# Altium PCB Hack_Final.PcbDoc (part 2 of 3)
Units mm, origin at the board's own origin, x right, y up, seen from the top; angles counter-clockwise.
Board outline 325.37 x 149.48 mm, 4 copper layers (Top Layer, Layer 1, Layer 2, Bottom Layer), stack 0.603 mm thick; 363 components, 196 nets, 927 pads, 198 vias.
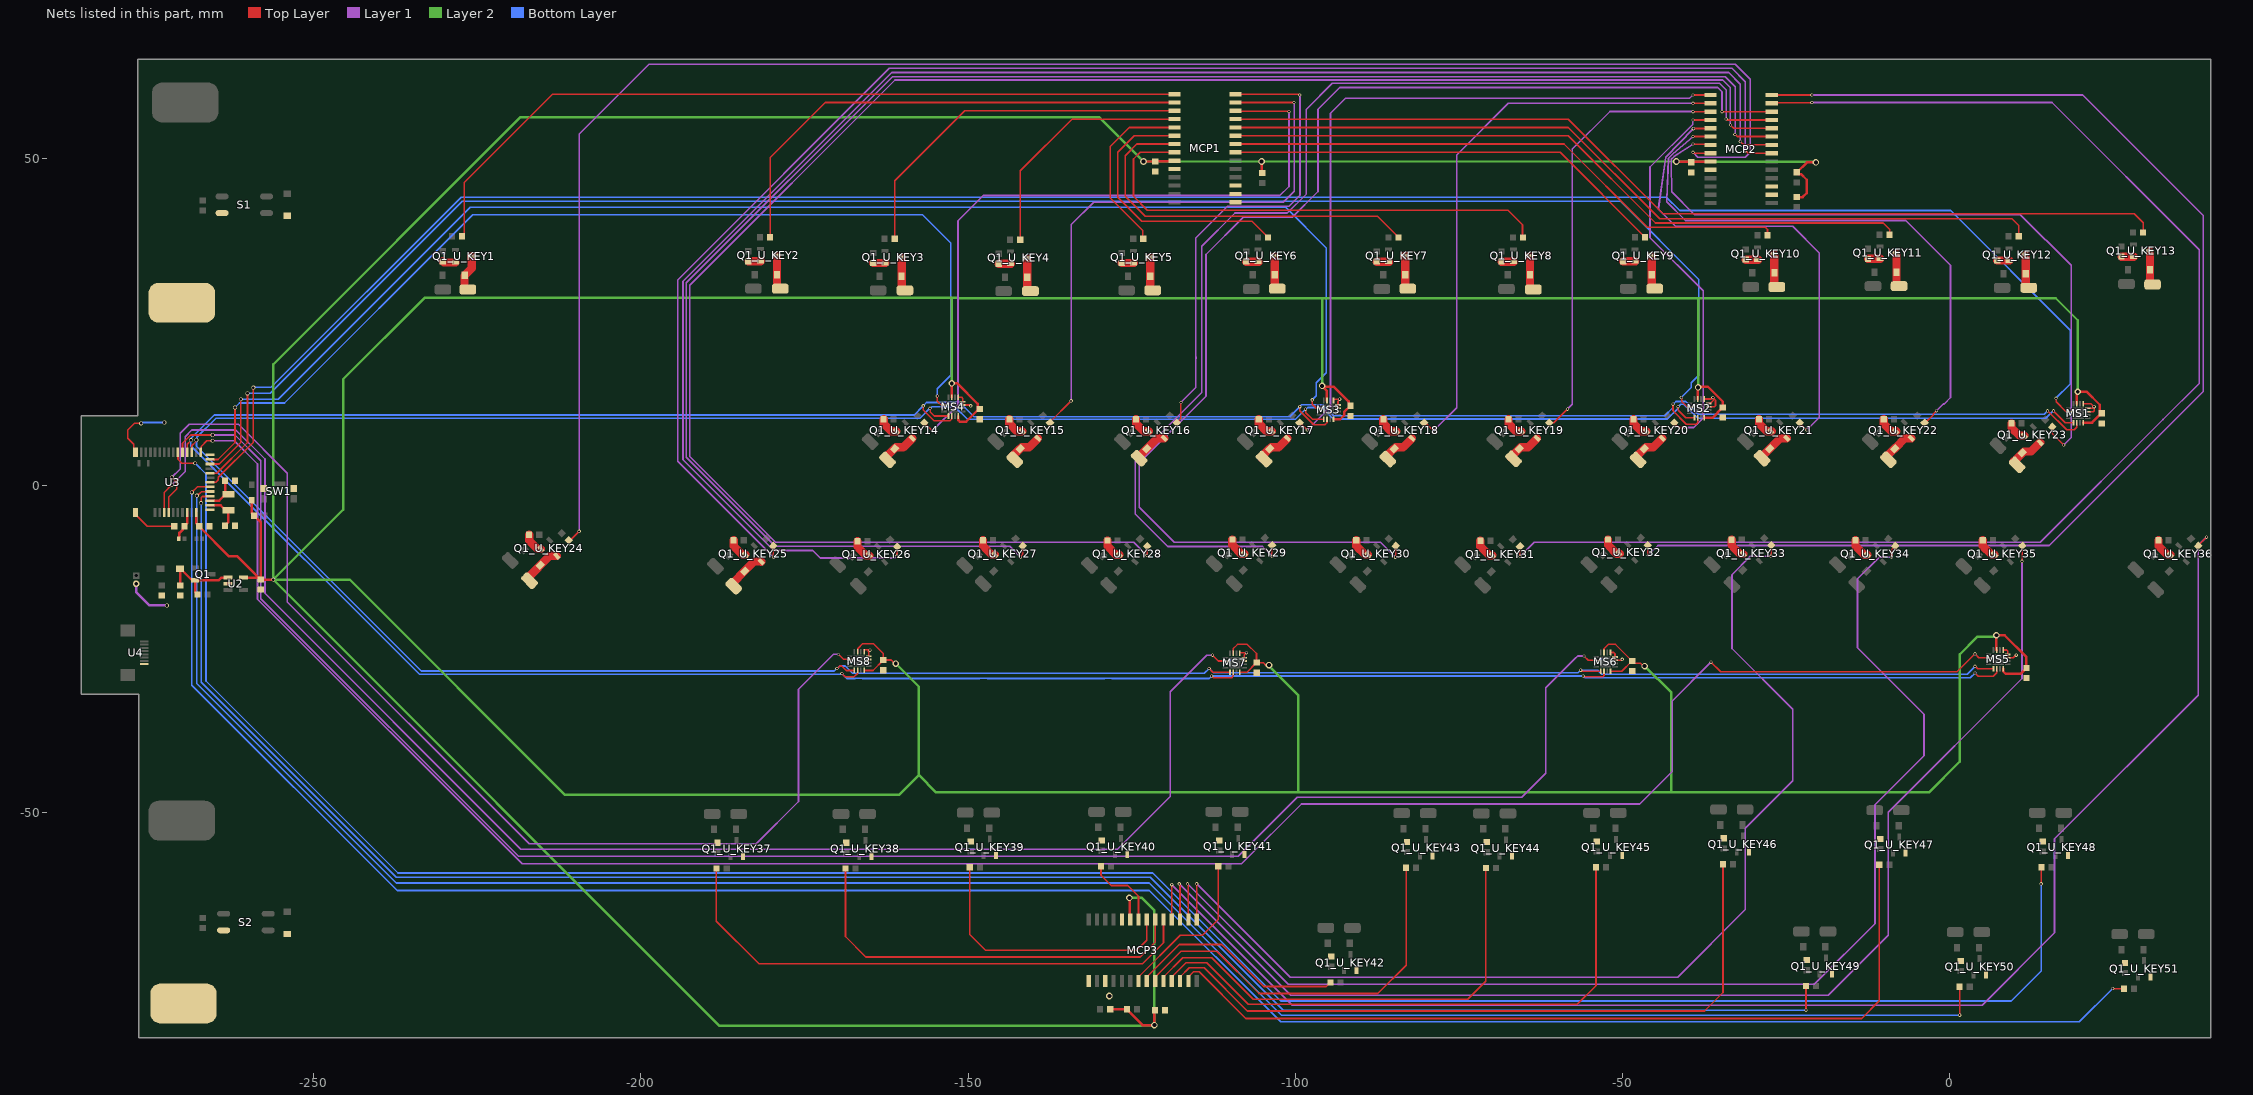
[diagram p4: the nets of this part, all layers, seen from the top]

## Part data
C1 C2 C3 C4 C5 C6 C7 C8 C9 C10 C11 C12 C13 C14 C15 C16 C17: library part CAP, "capacitance", Package=0603, SuppliersPartNumber=C15849, ComponentLink1Description=供应商链接, ComponentLink1URL=http://www.szlcsc.com/product/details_16531.html, Supplier=LC
D1: library part DIO_5, "schottky diode", Package=SOD-123, SuppliersPartNumber=C8598, ComponentLink1Description=供应商链接, ComponentLink1URL=http://www.szlcsc.com/product/details_9093.html, Supplier=LC
D1_U_KEY1 D1_U_KEY2 D1_U_KEY3 D1_U_KEY4 D1_U_KEY5 D1_U_KEY6 D1_U_KEY7 D1_U_KEY8 D1_U_KEY9 D1_U_KEY10 D1_U_KEY11 D1_U_KEY12 D1_U_KEY13 D1_U_KEY14 D1_U_KEY15 D1_U_KEY16 D1_U_KEY17 D1_U_KEY18 D1_U_KEY19 D1_U_KEY20 D1_U_KEY21 D1_U_KEY22 D1_U_KEY23 D1_U_KEY24 D1_U_KEY25 D1_U_KEY26 D1_U_KEY27 D1_U_KEY28 D1_U_KEY29 D1_U_KEY30 D1_U_KEY31 D1_U_KEY32 D1_U_KEY33 D1_U_KEY34 D1_U_KEY35 D1_U_KEY36 D1_U_KEY37 D1_U_KEY38 D1_U_KEY39 D1_U_KEY40 D1_U_KEY41 D1_U_KEY42 D1_U_KEY43 D1_U_KEY44 D1_U_KEY45 D1_U_KEY46 D1_U_KEY47 D1_U_KEY48 D1_U_KEY49 D1_U_KEY50 D1_U_KEY51 DSK1 DSK2: Average Rectified Current (Io)=1A, Forward Voltage (Vf@If)=700mV@1A, JLCPCB Part Class="Extended Part", LCSC Part Name="电压:60V 电流:1A", Manufacturer="HXY MOSFET(华轩阳电子)", Reverse Leakage Current (Ir)=-, Reverse Voltage (Vr)=60V, Add into BOM=yes, Convert to PCB=yes, Datasheet=https://atta.szlcsc.com/upload/public/pdf/source/20240126/50FF75CDB1A7B4BD07BEF0250A341C5F.pdf, Device=DSK16_C20611954, Diode Configuration=独立式, Manufacturer Part=DSK16, Name=DSK16, Supplier=LCSC, Supplier Footprint=SOD-123FL, Supplier Part=C20611954, Symbol=DSK16_C20611954
D2: library part DIO_4, "diode", Package=SOD-323, SuppliersPartNumber=C2128, ComponentLink1Description=供应商链接, ComponentLink1URL=http://www.szlcsc.com/product/details_2485.html, Supplier=LC
L1: library part IND_10uH, "inductance", Package=0805, SuppliersPartNumber=C1046, ComponentLink1Description=供应商链接, ComponentLink1URL=http://www.szlcsc.com/product/details_1398.html, Supplier=LC
L2: library part IND_15nH, "inductance", Package=0805, SuppliersPartNumber=C1046, ComponentLink1Description=供应商链接, ComponentLink1URL=http://www.szlcsc.com/product/details_1398.html, Supplier=LC
MCP1 MCP2 MCP3: "Integrated Circuit", Arrow Part Number=MCP23017T-E/SO, Manufacturer_Name=Microchip, Mouser Part Number=579-MCP23017T-E/SO, Arrow Price/Stock=https://www.arrow.com/en/products/mcp23017t-eso/microchip-technology?region=nac, Datasheet Link=http://ww1.microchip.com/downloads/en/DeviceDoc/20001952C.pdf, Height=2.65mm, Manufacturer_Part_Number=MCP23017T-E/SO, Mouser Price/Stock=https://www.mouser.co.uk/ProductDetail/Microchip-Technology/MCP23017T-E-SO?qs=usxtMOJb1RylPfT%252BJtgE3Q%3D%3D
MS1 MS2 MS3 MS4 MS5 MS6 MS7 MS8: "sensor"
P1+ P1- P2+ P2-: library part padding2
P+_U_KEY1 P+_U_KEY2 P+_U_KEY3 P+_U_KEY4 P+_U_KEY5 P+_U_KEY6 P+_U_KEY7 P+_U_KEY8 P+_U_KEY9 P+_U_KEY10 P+_U_KEY11 P+_U_KEY12 P+_U_KEY13 P+_U_KEY14 P+_U_KEY15 P+_U_KEY16 P+_U_KEY17 P+_U_KEY18 P+_U_KEY19 P+_U_KEY20 P+_U_KEY21 P+_U_KEY22 P+_U_KEY23 P+_U_KEY24 P+_U_KEY25 P+_U_KEY26 P+_U_KEY27 P+_U_KEY28 P+_U_KEY29 P+_U_KEY30 P+_U_KEY31 P+_U_KEY32 P+_U_KEY33 P+_U_KEY34 P+_U_KEY35 P+_U_KEY36 P+_U_KEY37 P+_U_KEY38 P+_U_KEY39 P+_U_KEY40 P+_U_KEY41 P+_U_KEY42 P+_U_KEY43 P+_U_KEY44 P+_U_KEY45 P+_U_KEY46 P+_U_KEY47 P+_U_KEY48 P+_U_KEY49 P+_U_KEY50 P+_U_KEY51 P-_U_KEY1 P-_U_KEY2 P-_U_KEY3 P-_U_KEY4 P-_U_KEY5 P-_U_KEY6 P-_U_KEY7 P-_U_KEY8 P-_U_KEY9 P-_U_KEY10 P-_U_KEY11 P-_U_KEY12 P-_U_KEY13 P-_U_KEY14 P-_U_KEY15 P-_U_KEY16 P-_U_KEY17 P-_U_KEY18 P-_U_KEY19 P-_U_KEY20 P-_U_KEY21 P-_U_KEY22 P-_U_KEY23 P-_U_KEY24 P-_U_KEY25 P-_U_KEY26 P-_U_KEY27 P-_U_KEY28 P-_U_KEY29 P-_U_KEY30 P-_U_KEY31 P-_U_KEY32 P-_U_KEY33 P-_U_KEY34 P-_U_KEY35 P-_U_KEY36 P-_U_KEY37 P-_U_KEY38 P-_U_KEY39 P-_U_KEY40 P-_U_KEY41 P-_U_KEY42 P-_U_KEY43 P-_U_KEY44 P-_U_KEY45 P-_U_KEY46 P-_U_KEY47 P-_U_KEY48 P-_U_KEY49 P-_U_KEY50 P-_U_KEY51: library part padding1
Q1: library part MOS, "field effect tube", Package=SOT-23(SOT-23-3), SuppliersPartNumber=C10487, ComponentLink1Description=供应商链接, ComponentLink1URL=http://www.szlcsc.com/product/details_11030.html, Supplier=LC
Q1_U_KEY1 Q1_U_KEY2 Q1_U_KEY3 Q1_U_KEY4 Q1_U_KEY5 Q1_U_KEY6 Q1_U_KEY7 Q1_U_KEY8 Q1_U_KEY9 Q1_U_KEY10 Q1_U_KEY11 Q1_U_KEY12 Q1_U_KEY13 Q1_U_KEY14 Q1_U_KEY15 Q1_U_KEY16 Q1_U_KEY17 Q1_U_KEY18 Q1_U_KEY19 Q1_U_KEY20 Q1_U_KEY21 Q1_U_KEY22 Q1_U_KEY23 Q1_U_KEY24 Q1_U_KEY25 Q1_U_KEY26 Q1_U_KEY27 Q1_U_KEY28 Q1_U_KEY29 Q1_U_KEY30 Q1_U_KEY31 Q1_U_KEY32 Q1_U_KEY33 Q1_U_KEY34 Q1_U_KEY35 Q1_U_KEY36 Q1_U_KEY37 Q1_U_KEY38 Q1_U_KEY39 Q1_U_KEY40 Q1_U_KEY41 Q1_U_KEY42 Q1_U_KEY43 Q1_U_KEY44 Q1_U_KEY45 Q1_U_KEY46 Q1_U_KEY47 Q1_U_KEY48 Q1_U_KEY49 Q1_U_KEY50 Q1_U_KEY51: Continuous Drain Current (Id)=1A, Drain Source On Resistance (RDS(on)@Vgs,Id)=630mΩ@10V,1A, Drain Source Voltage (Vdss)=100V, Gate Threshold Voltage (Vgs(th)@Id)=2.9V@250uA, Input Capacitance (Ciss@Vds)=100pF@50V, JLCPCB Part Class="Extended Part", LCSC Part Name="N沟道 耐压:100V 电流:1A", Manufacturer=AOS, Operating Temperature=-55℃~+150℃@(Tj), Power Dissipation (Pd)=1.4W, Add into BOM=yes, Convert to PCB=yes, Datasheet=https://atta.szlcsc.com/upload/public/pdf/source/20160507/1462613612106.pdf, Device=AO3442, Manufacturer Part=AO3442, Name=AO3442, Supplier=LCSC, Supplier Footprint=SOT-23-3L, Supplier Part=C71064, Symbol=AO3442, Total Gate Charge (Qg@Vgs)=6nC@10V, Type=N沟道
R1 R1_U_KEY1 R1_U_KEY2 R1_U_KEY3 R1_U_KEY4 R1_U_KEY5 R1_U_KEY6 R1_U_KEY7 R1_U_KEY8 R1_U_KEY9 R1_U_KEY10 R1_U_KEY11 R1_U_KEY12 R1_U_KEY13 R1_U_KEY14 R1_U_KEY15 R1_U_KEY16 R1_U_KEY17 R1_U_KEY18 R1_U_KEY19 R1_U_KEY20 R1_U_KEY21 R1_U_KEY22 R1_U_KEY23 R1_U_KEY24 R1_U_KEY25 R1_U_KEY26 R1_U_KEY27 R1_U_KEY28 R1_U_KEY29 R1_U_KEY30 R1_U_KEY31 R1_U_KEY32 R1_U_KEY33 R1_U_KEY34 R1_U_KEY35 R1_U_KEY36 R1_U_KEY37 R1_U_KEY38 R1_U_KEY39 R1_U_KEY40 R1_U_KEY41 R1_U_KEY42 R1_U_KEY43 R1_U_KEY44 R1_U_KEY45 R1_U_KEY46 R1_U_KEY47 R1_U_KEY48 R1_U_KEY49 R1_U_KEY50 R1_U_KEY51 R2 R2_U_KEY1 R2_U_KEY2 R2_U_KEY3 R2_U_KEY4 R2_U_KEY5 R2_U_KEY6 R2_U_KEY7 R2_U_KEY8 R2_U_KEY9 R2_U_KEY10 R2_U_KEY11 R2_U_KEY12 R2_U_KEY13 R2_U_KEY14 R2_U_KEY15 R2_U_KEY16 R2_U_KEY17 R2_U_KEY18 R2_U_KEY19 R2_U_KEY20 R2_U_KEY21 R2_U_KEY22 R2_U_KEY23 R2_U_KEY24 R2_U_KEY25 R2_U_KEY26 R2_U_KEY27 R2_U_KEY28 R2_U_KEY29 R2_U_KEY30 R2_U_KEY31 R2_U_KEY32 R2_U_KEY33 R2_U_KEY34 R2_U_KEY35 R2_U_KEY36 R2_U_KEY37 R2_U_KEY38 R2_U_KEY39 R2_U_KEY40 R2_U_KEY41 R2_U_KEY42 R2_U_KEY43 R2_U_KEY44 R2_U_KEY45 R2_U_KEY46 R2_U_KEY47 R2_U_KEY48 R2_U_KEY49 R2_U_KEY50 R2_U_KEY51 R5 R6 R7 R8 R9 R10 R11 R12: library part RES, "resistance", Package=0603, SuppliersPartNumber=C25819, ComponentLink1Description=供应商链接, ComponentLink1URL=http://www.szlcsc.com/product/details_26562.html, Supplier=LC
S1 S2: Continuous Load Current=1A, Input Forward Voltage=1.32V, Isolation Voltage(rms)=1.5kV, JLCPCB Part Class="Extended Part", LCSC Part Name=固态继电器, Manufacturer=SUPSiC(国晶微半导体), On Resistance=180mΩ, Voltage - Load=60V, Add into BOM=yes, Convert to PCB=yes, Datasheet=https://atta.szlcsc.com/upload/public/pdf/source/20231201/71CDF33FACEA97DA9648A52C46D9B1CB.pdf, Device=GAQY212GSX, Load Type=AC,DC, Manufacturer Part=GAQY212GSX, Name=GAQY212GSX, Relay Contact Form="1 Form A (SPST-NO)", Supplier=LCSC, Supplier Footprint=SOP-4, Supplier Part=C19271988, Symbol=GAQY212GSX, Turn-off time=100us, Turn-on time=350us
SW1: "Tactile Switch SPST-NO Top Actuated Surface Mount"
U1: library part BAT, "button cell battary holder BS-08-B2AA025"
U2: library part AP2112K, "LDO_ low dropout linear regulator"
U3: "RAYTAC  MDBT42Q-512KV2 Bluetooth Low Energy Module https://www.raytac.com/product/ins.php?index_id=31 https://www.snapeda.com/parts/MDBT42Q-512KV2/Raytac%20Corporation/view-part/?ref=search&t=MDBT42Q-512KV2"
X1: library part ABS07-32.768KHZ-7-T, "crystal", Package=SMD-3215_2P, SuppliersPartNumber=C32346, ComponentLink1Description=供应商链接, ComponentLink1URL=http://www.szlcsc.com/product/details_33310.html, Supplier=LC

## Via types
v1: diameter 0.5, hole 0.3, Top Layer to Bottom Layer, 91 vias
v2: diameter 1, hole 0.6, Top Layer to Bottom Layer, 72 vias
v3: diameter 0.6, hole 0.4, Top Layer to Bottom Layer, 35 vias

## Nets (pads, with @x,y where several pads share a name; then routed paths per layer and width w, separated by ;. In a path a pad name is that pad's centre, name@x,y a point inside that pad or via, vN(x,y) a via of type N, cw(c..) or ccw(c..) an arc to the next point about the centre after c; other vN are vias at no path point)
3V3: C2.2 C5.2 C7.1 C8.1 C9.1 C10.2 C11.2 C12.2 C13.2 C14.2 C15.2 C16.2 C17.2 D2.2 MCP1.9 MCP2.9 MCP3.9 MS1.8 MS1.15 MS2.8 MS2.15 MS3.8 MS3.15 MS4.8 MS4.15 MS5.8 MS5.15 MS6.8 MS6.15 MS7.8 MS7.15 MS8.8 MS8.15 R5.2 R6.1 R7.1 R8.2 R9.1 R10.2 U2.5 U3.11 | length 1353.2
  Top Layer w0.254: C2.2@-258.064,-14.343 C2.2@-258.056,-14.351 ; MS8.15@-166.874,-25.362 -166.871,-25.359 -166.871,-24.926 -166.075,-24.13 -164.465,-24.13 -162.941,-25.654 -162.941,-26.641 -161.735,-26.641 -161.178,-27.198 v2(-161.046,-27.198) ; MS8.8@-165.874,-28.232 -164.528,-28.232 -162.966,-26.67 C17.2@-162.941,-26.67 ; MS7.15@-109.47,-25.616 -109.47,-24.888 -108.839,-24.257 -107.315,-24.257 -105.918,-25.654 C16.2@-105.918,-27.051 ; MS7.8@-108.47,-28.486 -107.378,-28.486 -105.943,-27.051 C16.2@-105.918,-27.051 ; v2(-104.013,-27.417) -104.489,-27.416 -104.854,-27.051 C16.2@-105.918,-27.051 ; MS6.15@-52.828,-25.489 -52.825,-25.486 -52.825,-24.907 -52.175,-24.257 -51.071,-24.257 C15.2@-48.539,-26.789 ; MS6.8@-51.828,-28.359 -50.109,-28.359 C15.2@-48.539,-26.789 ; v2(-46.609,-27.559) -46.811,-27.559 -47.243,-27.127 -48.176,-27.127 C15.2@-48.514,-26.789 C15.2@-48.539,-26.789
  Top Layer w0.381: U3.11@-267.926,-4.092 -267.926,-5.742 -267.47,-6.198 C5.2@-267.47,-6.223 -267.47,-6.248 -262.923,-10.795 -261.637,-10.795 C2.2@-258.41,-14.022 ; U2.5@-260.689,-14.036 -258.396,-14.036 C2.2@-258.089,-14.343 ; D2.2@-259.437,-2.2 -259.437,-4.19 -259.08,-4.547 R5.2@-259.08,-4.572 -259.08,-4.597 -258.064,-5.613 C2.2@-258.064,-14.343 ; C2.2@-258.056,-14.351 v3(-256.159,-14.351) ; MS4.15@-152.485,13.504 v2(-152.485,15.621) -151.638,15.621 -148.522,12.505 -148.522,11.878 C13.2@-148.336,11.692 ; MS4.8@-151.485,10.634 -151.485,10.002 -151.262,9.779 -150.274,9.779 C13.2@-148.361,11.692 ; R10.2@-128.27,-80.01 R9.1@-125.738,-80.01 -125.738,-80.035 -123.35,-82.423 v2(-121.539,-82.423) -121.539,-80.256 C9.1@-121.42,-80.137 ; v2(-125.349,-62.992) -125.285,-63.055 -125.285,-66.255 MCP3.9@-125.222,-66.318 ; v2(-123.19,49.53) C7.1@-121.412,49.53 -121.349,49.593 -118.53,49.593 MCP1.9@-118.467,49.657 ; v2(-105.156,49.53) -105.093,49.466 -105.093,47.823 R6.1@-105.029,47.76 ; MS3.15@-95.157,13.011 -95.157,14.453 -95.885,15.181 v2(-95.885,15.24) -95.781,15.136 -94.13,15.136 -91.866,12.872 -91.866,12.489 C12.2@-91.592,12.215 ; MS3.8@-94.157,10.141 -93.134,10.141 -92.5,10.775 -92.5,11.306 C12.2@-91.592,12.215 ; v2(-41.783,49.53) -41.724,49.471 -39.556,49.471 C8.1@-39.497,49.411 -39.438,49.471 -36.611,49.471 MCP2.9@-36.552,49.53 ; MS2.15@-38.515,13.234 -38.486,13.264 -38.486,14.978 v2(-38.456,15.008) ; v2@-38.376,15.113 -36.957,15.113 -34.671,12.827 C11.2@-34.671,11.946 -34.696,11.946 -36.278,10.364 MS2.8@-37.515,10.364 ; R8.2@-23.368,44.077 -22.471,44.077 -21.844,44.704 -21.844,46.736 -22.72,47.612 -23.093,47.612 R7.1@-23.368,47.887 ; R7.1@-23.343,47.887 -21.827,49.403 v2(-20.447,49.403) ; MS5.15@7.171,-25.118 7.141,-25.088 7.141,-22.889 v2(7.112,-22.86) 8.377,-22.86 11.702,-26.185 C14.2@11.702,-27.861 ; MS5.8@8.171,-27.988 8.171,-28.369 8.552,-28.75 10.813,-28.75 C14.2@11.702,-27.861 ; C14.2@11.727,-27.861 C14.2@11.702,-27.861 ; MS1.15@19.397,12.496 19.397,14.022 19.558,14.183 v2(19.558,14.351) 19.57,14.363 20.917,14.363 22.924,12.356 C10.2@22.924,11.061 ; MS1.8@20.397,9.626 21.76,9.626 22.903,10.769 22.903,10.794 23.178,11.069 C10.2@23.203,11.069 ; C12.2@-91.592,12.215 C12.2@-91.567,12.215 C12.2@-91.592,12.215
  Layer 2 w0.381: v2(-161.046,-27.198) -157.511,-30.733 -157.511,-44.227 ; v2(-152.485,15.621) -152.485,28.702 ; v2(-125.349,-62.992) -123.444,-62.992 -121.539,-64.897 v2(-121.539,-82.423) ; v2@-121.539,-82.55 -187.96,-82.55 v3(-256.159,-14.351) ; v2(-104.013,-27.417) -104.013,-27.559 -99.568,-32.004 -99.568,-46.863 ; v2(-95.885,15.24) -95.885,28.639 ; v2(-46.609,-27.559) -42.545,-31.623 -42.545,-46.863 ; v2(-38.456,15.008) -38.456,28.613 -38.481,28.639 ; v2(-20.447,49.403) -20.511,49.466 -41.719,49.466 v2(-41.783,49.53) v2(-105.156,49.53) v2(-123.19,49.53) -129.921,56.261 -218.44,56.261 -256.159,18.542 v3(-256.159,-14.351) ; v2@7.239,-23.114 4.191,-23.114 1.524,-25.781 1.524,-42.164 -3.175,-46.863 -42.545,-46.863 ; v2(19.558,14.351) 19.558,25.273 16.192,28.639 -38.481,28.639 ; v3(-256.159,-14.351) -244.475,-14.351 -211.582,-47.244 -160.528,-47.244 -157.511,-44.227 ; v3(-256.159,-14.351) -245.491,-3.683 -245.491,16.256 -233.045,28.702 -152.485,28.702 ; -157.511,-44.227 -154.875,-46.863 -99.568,-46.863 ; -152.485,28.702 -151.638,28.702 -151.575,28.639 -95.885,28.639 ; -99.568,-46.863 -42.545,-46.863 ; -95.885,28.639 -38.481,28.639
CS1: MS1.2 U3.18 | length 330.3
  Top Layer w0.254: U3.18@-265.826,0.508 -265.801,0.533 -264.921,0.533 -264.541,0.913 -264.541,1.27 -259.207,6.604 v3(-259.207,14.986) ; v1(16.218,13.347) 16.265,13.3 16.265,12.825 17.776,11.314 18.209,11.314 MS1.2@18.212,11.311
  Bottom Layer w0.254: v3(-259.207,14.986) -259.165,15.028 -256.498,15.028 -227.457,44.069 -43.307,44.069 -41.275,42.037 0.136,42.037 18.415,23.758 18.415,15.544 v1(16.218,13.347)
CS2: MS2.2 U3.20 | length 275.4
  Top Layer w0.254: U3.20@-265.836,1.908 U3.20@-265.826,1.908 -264.792,1.908 -260.096,6.604 v3(-260.096,14.097) ; v1(-41.021,13.462) -40.974,13.415 -40.974,12.89 -40.136,12.052 -39.703,12.052 MS2.2@-39.7,12.049
  Bottom Layer w0.254: v3(-260.096,14.097) -256.613,14.097 -227.276,43.434 -50.292,43.434 -38.354,31.496 -38.354,16.891 -39.497,15.748 -39.497,14.986 v1(-41.021,13.462)
CS3: MS3.2 U3.22 | length 219.4
  Top Layer w0.254: U3.22@-265.826,3.308 -264.408,3.308 -261.112,6.604 v3(-261.112,13.208) ; v1(-97.409,13.123) -97.409,12.46 -96.778,11.829 -96.345,11.829 MS3.2@-96.342,11.826
  Bottom Layer w0.254: v3(-261.112,13.208) -255.397,13.208 -226.06,42.545 -101.473,42.545 -95.25,36.322 -95.25,17.272 -96.774,15.748 -96.774,13.758 v1(-97.409,13.123)
CS4: MS4.2 U3.23 | length 159.9
  Top Layer w0.254: U3.23@-265.836,4.008 U3.23@-265.826,4.008 -264.597,4.008 -262.001,6.604 v3(-262.001,11.938) ; v1(-154.686,13.716) -154.686,12.902 -154.106,12.322 -153.673,12.322 MS4.2@-153.67,12.319
  Bottom Layer w0.254: v3(-262.001,11.938) -261.308,12.631 -254.45,12.631 -225.679,41.402 -156.972,41.402 -152.654,37.084 -152.654,16.847 -154.686,14.815 v1(-154.686,13.716)
CS5: MS5.2 U3.25 | length 334.2
  Top Layer w0.254: U3.25@-267.226,5.108 -267.182,5.152 -267.182,5.995 -266.319,6.858 v3(-265.43,6.858) ; v1(-36.477,-26.975) -35.004,-28.448 1.106,-28.448 v1(3.853,-25.702) 4.454,-26.303 MS5.2@5.986,-26.303
  Layer 1 w0.254: v3(-265.43,6.858) -262.128,6.858 -258.572,3.302 -258.572,-17.335 -218.122,-57.785 -108.204,-57.785 -99.06,-48.641 -47.371,-48.641 -42.418,-43.688 -42.418,-32.893 v1@-36.576,-27.051
CS6: MS6.2 U3.29 | length 277.5
  Top Layer w0.254: U3.29@-270.026,5.108 -270.026,6.486 -268.765,7.747 v3(-265.43,7.747) ; v1(-55.88,-26.035) -55.241,-26.674 MS6.2@-54.013,-26.674
  Layer 1 w0.254: v3(-265.43,7.747) -262.001,7.747 -258.064,3.81 -258.064,-17.272 -218.694,-56.642 -108.712,-56.642 -99.695,-47.625 -65.405,-47.625 -61.722,-43.942 -61.722,-30.861 -57.133,-26.272 -56.894,-26.102 ccw(c-61.91,-19.05) -56.801,-26.035 v1(-55.88,-26.035)
CS7: MS7.2 U3.4 | length 232.9
  Top Layer w0.254: U3.4@-272.826,-4.092 -272.826,-1.046 v3(-271.653,0.127) ; v1(-112.649,-25.908) -111.756,-26.801 MS7.2@-110.655,-26.801
  Layer 1 w0.254: v3(-271.653,0.127) -269.621,2.159 -269.621,7.493 -268.605,8.509 -261.874,8.509 -257.429,4.064 -257.429,-16.446 -218.33,-55.546 -127.174,-55.546 -119.126,-47.498 -119.126,-31.496 -113.538,-25.908 v1(-112.649,-25.908)
CS8: MS8.2 U3.5 | length 176.8
  Top Layer w0.254: U3.5@-272.126,-4.092 -272.126,-1.743 -270.891,-0.508 -270.891,0.508 v3(-271.653,1.27) ; v1(-169.799,-25.781) -169.033,-26.547 MS8.2@-168.059,-26.547
  Layer 1 w0.254: v3(-271.653,1.27) -270.383,2.54 -270.383,8.001 -269.017,9.367 -261.462,9.367 -254,1.905 -254,-17.78 -217.043,-54.737 -182.372,-54.737 -175.895,-48.26 -175.895,-31.115 -170.561,-25.781 v1(-169.799,-25.781)
GND: C1.1 C2.1 C3.2 C4.2 C5.1 C6.1 C7.2 C8.2 C9.2 C10.1 C11.1 C12.1 C13.1 C14.1 C15.1 C16.1 C17.1 DSK1.2 DSK2.2 MCP1.10 MCP1.15 MCP1.16 MCP1.17 MCP2.10 MCP2.16 MCP2.17 MCP3.10 MCP3.15 MCP3.17 MS1.11 MS1.12 MS1.13 MS2.11 MS2.12 MS2.13 MS3.11 MS3.12 MS3.13 MS4.11 MS4.12 MS4.13 MS5.11 MS5.12 MS5.13 MS6.11 MS6.12 MS6.13 MS7.11 MS7.12 MS7.13 MS8.11 MS8.12 MS8.13 P1-.1 P2-.1 Q1_U_KEY1.2 Q1_U_KEY2.2 Q1_U_KEY3.2 Q1_U_KEY4.2 Q1_U_KEY5.2 Q1_U_KEY6.2 Q1_U_KEY7.2 Q1_U_KEY8.2 Q1_U_KEY9.2 Q1_U_KEY10.2 Q1_U_KEY11.2 Q1_U_KEY12.2 Q1_U_KEY13.2 Q1_U_KEY14.2 Q1_U_KEY15.2 Q1_U_KEY16.2 Q1_U_KEY17.2 Q1_U_KEY18.2 Q1_U_KEY19.2 Q1_U_KEY20.2 Q1_U_KEY21.2 Q1_U_KEY22.2 Q1_U_KEY23.2 Q1_U_KEY24.2 Q1_U_KEY25.2 Q1_U_KEY26.2 Q1_U_KEY27.2 Q1_U_KEY28.2 Q1_U_KEY29.2 Q1_U_KEY30.2 Q1_U_KEY31.2 Q1_U_KEY32.2 Q1_U_KEY33.2 Q1_U_KEY34.2 Q1_U_KEY35.2 Q1_U_KEY36.2 Q1_U_KEY37.2 Q1_U_KEY38.2 Q1_U_KEY39.2 Q1_U_KEY40.2 Q1_U_KEY41.2 Q1_U_KEY42.2 Q1_U_KEY43.2 Q1_U_KEY44.2 Q1_U_KEY45.2 Q1_U_KEY46.2 Q1_U_KEY47.2 Q1_U_KEY48.2 Q1_U_KEY49.2 Q1_U_KEY50.2 Q1_U_KEY51.2 R1.1 R2_U_KEY1.1 R2_U_KEY2.1 R2_U_KEY3.1 R2_U_KEY4.1 R2_U_KEY5.1 R2_U_KEY6.1 R2_U_KEY7.1 R2_U_KEY8.1 R2_U_KEY9.1 R2_U_KEY10.1 R2_U_KEY11.1 R2_U_KEY12.1 R2_U_KEY13.1 R2_U_KEY14.1 R2_U_KEY15.1 R2_U_KEY16.1 R2_U_KEY17.1 R2_U_KEY18.1 R2_U_KEY19.1 R2_U_KEY20.1 R2_U_KEY21.1 R2_U_KEY22.1 R2_U_KEY23.1 R2_U_KEY24.1 R2_U_KEY25.1 R2_U_KEY26.1 R2_U_KEY27.1 R2_U_KEY28.1 R2_U_KEY29.1 R2_U_KEY30.1 R2_U_KEY31.1 R2_U_KEY32.1 R2_U_KEY33.1 R2_U_KEY34.1 R2_U_KEY35.1 R2_U_KEY36.1 R2_U_KEY37.1 R2_U_KEY38.1 R2_U_KEY39.1 R2_U_KEY40.1 R2_U_KEY41.1 R2_U_KEY42.1 R2_U_KEY43.1 R2_U_KEY44.1 R2_U_KEY45.1 R2_U_KEY46.1 R2_U_KEY47.1 R2_U_KEY48.1 R2_U_KEY49.1 R2_U_KEY50.1 R2_U_KEY51.1 S1.2 S2.2 SW1.2 SW1.4 U1.2 U2.2 U3.1 U3.12 U3.24 U3.39 U4.8 | length 148.4
  Top Layer w0.254: U3.1@-277.226,-4.092 -277.226,-4.392 -275.395,-6.223 C6.1@-271.288,-6.223 ; U3.39@-277.226,5.108 -277.474,5.356 -277.474,6.329 -278.384,7.239 -278.384,8.509 -277.368,9.525 v3(-276.352,9.525) ; R1.1@-273.423,-17.018 R1.1@-273.177,-16.772 ; MS8.13@-165.874,-25.362 -165.874,-25.079 -165.871,-25.076 -165.297,-25.076 -165.274,-25.099 -165.02,-25.099 v1(-164.973,-25.146) ; -165.256,-25.362 v1@-165.04,-25.146 ; MS8.11@-165.189,-26.547 MS8.12@-165.189,-26.047 -165.189,-25.429 ; MS4.13@-151.485,13.504 -150.974,13.504 -150.8,13.33 MS4.11@-150.8,12.319 -149.781,12.319 -149.654,12.192 v1(-149.587,12.192) ; MS7.13@-108.47,-25.616 -108.47,-25.53 -108.467,-25.527 v1(-107.442,-25.527) -107.785,-25.87 MS7.12@-107.785,-26.301 MS7.11@-107.785,-26.801 ; MS3.13@-94.157,13.011 -94.157,13.205 -94.154,13.208 v1(-93.218,13.208) ; MS3.11@-93.472,11.826 -93.472,12.866 -93.265,13.073 -93.265,13.189 v1@-93.285,13.208 ; MS6.13@-51.828,-25.489 -51.317,-25.489 -51.143,-25.663 MS6.11@-51.143,-26.674 -50.236,-26.674 -50.105,-26.543 v1(-50.038,-26.543) ; MS2.13@-37.515,13.234 -36.49,13.234 -36.262,13.462 v1(-36.195,13.462) v1@-36.148,13.415 ; MS2.11@-36.83,12.049 -35.957,12.049 -35.792,12.214 -35.792,13.059 v1@-36.148,13.415 ; MS2.12@-36.83,12.549 -36.53,12.549 -36.527,12.552 -36.527,12.622 -36.148,13.001 v1@-36.148,13.415 ; MS5.13@8.171,-25.121 8.707,-25.121 8.856,-25.27 MS5.12@8.856,-25.803 MS5.11@8.856,-26.303 9.699,-26.303 10.093,-25.908 v1(10.16,-25.908) ; MS1.13@20.397,12.496 21.587,12.496 22.006,12.077 v1(22.06,12.077) ; MS1.11@21.082,11.311 21.911,11.311 22.06,11.46 v1(22.06,12.077) ; MS1.12@21.082,11.811 21.794,11.811 v1(22.06,12.077)
  Top Layer w1.27: R2_U_KEY1.1@-230.251,34.282 -230.071,34.102 Q1_U_KEY1.2@-228.311,34.102 ; R2_U_KEY24.1@-217.059,-7.493 -217.059,-8.366 -215.753,-9.672 Q1_U_KEY24.2@-215.265,-9.672 ; R2_U_KEY25.1@-185.808,-8.354 -185.808,-9.227 -184.503,-10.533 Q1_U_KEY25.2@-184.015,-10.533 ; R2_U_KEY2.1@-183.556,34.282 Q1_U_KEY2.2@-181.669,34.282 ; R2_U_KEY26.1@-166.885,-8.481 -166.885,-9.354 -165.58,-10.66 Q1_U_KEY26.2@-165.092,-10.66 ; R2_U_KEY3.1@-164.506,34.028 Q1_U_KEY3.2@-162.619,34.028 ; R2_U_KEY14.1@-162.903,10.153 -162.903,9.487 -161.717,8.301 Q1_U_KEY14.2@-160.944,8.301 ; R2_U_KEY27.1@-147.708,-8.354 -147.708,-9.227 -146.403,-10.533 Q1_U_KEY27.2@-145.915,-10.533 ; R2_U_KEY4.1@-145.329,33.901 Q1_U_KEY4.2@-143.442,33.901 ; R2_U_KEY15.1@-143.691,10.153 -143.691,9.487 -142.505,8.301 Q1_U_KEY15.2@-141.732,8.301 ; R2_U_KEY28.1@-128.702,-8.383 -128.702,-9.256 -127.396,-10.562 Q1_U_KEY28.2@-126.908,-10.562 ; R2_U_KEY5.1@-126.533,34.028 Q1_U_KEY5.2@-124.646,34.028 ; R2_U_KEY16.1@-124.331,10.153 -124.331,9.487 -123.146,8.301 Q1_U_KEY16.2@-122.372,8.301 ; R2_U_KEY29.1@-109.608,-8.227 -109.608,-9.1 -108.303,-10.406 Q1_U_KEY29.2@-107.815,-10.406 ; R2_U_KEY6.1@-107.483,34.231 Q1_U_KEY6.2@-105.596,34.231 ; R2_U_KEY17.1@-105.577,10.153 -105.577,9.487 -104.392,8.301 Q1_U_KEY17.2@-103.618,8.301 ; R2_U_KEY30.1@-90.685,-8.354 -90.685,-9.227 -89.38,-10.533 Q1_U_KEY30.2@-88.892,-10.533 ; R2_U_KEY7.1@-87.544,34.231 Q1_U_KEY7.2@-85.657,34.231 ; R2_U_KEY18.1@-86.546,10.153 -86.546,9.487 -85.36,8.301 Q1_U_KEY18.2@-84.587,8.301 ; R2_U_KEY31.1@-71.717,-8.436 -71.717,-9.309 -70.412,-10.614 Q1_U_KEY31.2@-69.923,-10.614 ; R2_U_KEY8.1@-68.494,34.231 Q1_U_KEY8.2@-66.607,34.231 ; R2_U_KEY19.1@-67.434,10.153 -67.434,9.487 -66.249,8.301 Q1_U_KEY19.2@-65.476,8.301 ; R2_U_KEY32.1@-52.204,-8.227 -52.204,-9.1 -50.899,-10.406 Q1_U_KEY32.2@-50.411,-10.406 ; R2_U_KEY9.1@-49.892,34.267 Q1_U_KEY9.2@-48.005,34.267 ; R2_U_KEY20.1@-48.314,10.153 -48.314,9.487 -47.128,8.301 Q1_U_KEY20.2@-46.355,8.301 ; R2_U_KEY33.1@-33.325,-8.256 -33.325,-9.129 -32.019,-10.435 Q1_U_KEY33.2@-31.531,-10.435 ; R2_U_KEY10.1@-31.156,34.541 Q1_U_KEY10.2@-29.269,34.541 ; R2_U_KEY21.1@-29.142,10.153 -29.142,9.487 -27.956,8.301 Q1_U_KEY21.2@-27.183,8.301 ; R2_U_KEY34.1@-14.387,-8.362 -14.387,-9.235 -13.081,-10.541 Q1_U_KEY34.2@-12.593,-10.541 ; R2_U_KEY11.1@-12.487,34.663 Q1_U_KEY11.2@-10.6,34.663 ; R2_U_KEY22.1@-10.087,10.153 -10.087,9.487 -8.901,8.301 Q1_U_KEY22.2@-8.128,8.301 ; R2_U_KEY35.1@5.044,-8.338 5.044,-9.211 6.35,-10.517 Q1_U_KEY35.2@6.838,-10.517 ; R2_U_KEY12.1@7.239,34.409 Q1_U_KEY12.2@9.126,34.409 ; R2_U_KEY23.1@9.444,9.508 9.444,8.842 10.629,7.657 Q1_U_KEY23.2@11.402,7.657 ; R2_U_KEY13.1@26.248,34.993 Q1_U_KEY13.2@28.135,34.993 ; R2_U_KEY36.1@31.889,-8.354 31.889,-9.227 33.195,-10.533 Q1_U_KEY36.2@33.683,-10.533
  Layer 1 w0.381: U1.2@-277.114,-14.986 -277.114,-16.256 -275.067,-18.303 v3(-272.424,-18.303)
  Bottom Layer w0.254: v3(-276.352,9.525) -276.258,9.525 -276.131,9.652 v3(-272.796,9.652)
  other v2: -128.397,-77.978
KEY1: MCP1.1 R1_U_KEY1.1 | length 122.5
  Top Layer w0.254: R1_U_KEY1.1@-227.322,38.1 -226.984,38.438 -226.984,46.32 -213.487,59.817 MCP1.1@-118.467,59.817
KEY2: MCP1.2 R1_U_KEY2.1 | length 77.4
  Top Layer w0.254: R1_U_KEY2.1@-180.246,37.973 -180.246,50.132 -171.831,58.547 MCP1.2@-118.467,58.547
KEY3: MCP1.3 R1_U_KEY3.1 | length 56
  Top Layer w0.254: R1_U_KEY3.1@-161.196,37.719 -161.196,46.576 -150.495,57.277 MCP1.3@-118.467,57.277
KEY4: MCP1.4 R1_U_KEY4.1 | length 37.3
  Top Layer w0.254: R1_U_KEY4.1@-142.019,37.592 -142.019,48.1 -134.112,56.007 MCP1.4@-118.467,56.007
KEY5: MCP1.5 R1_U_KEY5.1 | length 27.2
  Top Layer w0.254: R1_U_KEY5.1@-123.223,37.719 -123.317,37.813 -123.317,38.989 -128.27,43.942 -128.27,51.816 -125.349,54.737 MCP1.5@-118.467,54.737
KEY6: MCP1.6 R1_U_KEY6.1 | length 42.1
  Top Layer w0.254: MCP1.6@-118.467,53.467 -124.587,53.467 -127.127,50.927 -127.127,44.069 -123.444,40.386 -106.612,40.386 -104.173,37.947 R1_U_KEY6.1@-104.173,37.922
KEY7: MCP1.7 R1_U_KEY7.1 | length 58.8
  Top Layer w0.254: MCP1.7@-118.467,52.197 -124.206,52.197 -125.984,50.419 -125.984,44.196 -122.936,41.148 -87.435,41.148 -84.234,37.947 R1_U_KEY7.1@-84.234,37.922
KEY8: MCP1.8 R1_U_KEY8.1 | length 75.6
  Top Layer w0.254: MCP1.8@-118.467,50.927 -123.698,50.927 -124.714,49.911 -124.714,44.196 -122.618,42.1 -67.5,42.1 -65.278,39.878 -65.278,38.016 R1_U_KEY8.1@-65.184,37.922
KEY9: MCP1.21 R1_U_KEY9.1 | length 67.9
  Top Layer w0.254: MCP1.21@-109.117,50.927 -59.526,50.927 -46.582,37.983 R1_U_KEY9.1@-46.582,37.958
KEY10: MCP1.22 R1_U_KEY10.1 | length 87.6
  Top Layer w0.254: MCP1.22@-109.117,52.197 -58.928,52.197 -46.228,39.497 -28.194,39.497 -27.846,39.149 R1_U_KEY10.1@-27.846,38.232
KEY11: MCP1.23 R1_U_KEY11.1 | length 106.7
  Top Layer w0.254: MCP1.23@-109.117,53.467 -58.293,53.467 -44.958,40.132 -10.16,40.132 -9.177,39.149 R1_U_KEY11.1@-9.177,38.354
KEY12: MCP1.24 R1_U_KEY12.1 | length 127.5
  Top Layer w0.254: MCP1.24@-109.117,54.737 -58.293,54.737 -44.323,40.767 9.525,40.767 10.549,39.743 R1_U_KEY12.1@10.549,38.1
KEY13: MCP1.25 R1_U_KEY13.1 | length 146.7
  Top Layer w0.254: MCP1.25@-109.117,56.007 -58.293,56.007 -43.815,41.529 28.194,41.529 29.558,40.165 R1_U_KEY13.1@29.558,38.684
KEY14: MCP1.26 R1_U_KEY14.1 | length 107.8
  Top Layer w0.254: R1_U_KEY14.1@-156.682,9.616 v1(-155.448,8.382) ; MCP1.26@-109.117,57.277 -109.037,57.197 -101.012,57.197 v1(-100.965,57.15)
  Layer 1 w0.254: v1(-155.448,8.382) -151.534,12.296 -151.534,40.49 -147.701,44.323 -102.362,44.323 -100.965,45.72 v1(-100.965,57.15)
KEY15: MCP1.27 R1_U_KEY15.1 | length 90.3
  Top Layer w0.254: R1_U_KEY15.1@-137.47,9.616 -137.47,9.723 v1(-134.239,12.954) ; MCP1.27@-109.117,58.547 v1(-100.203,58.547)
  Layer 1 w0.254: v1(-134.239,12.954) -134.226,12.967 -134.226,39.891 -130.81,43.307 -101.854,43.307 -100.173,44.988 -100.173,58.517 v1(-100.203,58.547)
KEY16: MCP1.28 R1_U_KEY16.1 | length 73.2
  Top Layer w0.254: R1_U_KEY16.1@-118.092,9.633 -117.475,10.251 v1(-117.475,12.7) ; MCP1.28@-109.117,59.817 -99.508,59.817 -99.381,59.69 v1(-99.314,59.69)
  Layer 1 w0.254: v1(-117.475,12.7) -115.263,14.912 -115.189,14.986 -115.189,19.078 ccw(c-123.83,19.55) -115.189,20.022 -115.189,37.846 -110.363,42.672 -100.965,42.672 -99.284,44.353 -99.284,59.66 v1(-99.314,59.69)
KEY17: MCP2.1 R1_U_KEY17.1 | length 110.7
  Top Layer w0.254: R1_U_KEY17.1@-99.356,9.616 -99.278,9.616 v1(-98.171,8.509) ; v1(-39.243,59.69) MCP2.1@-36.552,59.69
  Layer 1 w0.254: v1(-98.171,8.509) -94.615,12.065 -94.615,56.896 -92.329,59.182 -39.751,59.182 v1(-39.243,59.69)
KEY18: MCP2.2 R1_U_KEY18.1 | length 87.6
  Top Layer w0.254: R1_U_KEY18.1@-80.325,9.616 -80.101,9.616 v1(-78.867,8.382) ; v1(-39.243,58.42) MCP2.2@-36.552,58.42
  Layer 1 w0.254: v1(-78.867,8.382) -75.334,11.915 -75.334,50.523 -67.437,58.42 v1(-39.243,58.42)
KEY19: MCP2.3 R1_U_KEY19.1 | length 67.2
  Top Layer w0.254: R1_U_KEY19.1@-61.213,9.616 -60.735,9.616 -60.718,9.633 -60.7,9.616 -60.488,9.616 v1(-58.42,11.684) ; v1(-39.243,57.15) MCP2.3@-36.552,57.15
  Layer 1 w0.254: v1(-58.42,11.684) -57.658,12.446 -57.658,51.435 -51.921,57.172 -39.265,57.172 v1(-39.243,57.15)
KEY20: MCP2.4 R1_U_KEY20.1 | length 59.6
  Top Layer w0.254: R1_U_KEY20.1@-42.093,9.616 -41.367,8.89 v1(-40.64,8.89) ; v1(-39.243,55.88) MCP2.4@-36.552,55.88
  Layer 1 w0.254: v1(-40.64,8.89) -39.116,8.89 -37.679,10.327 -37.679,29.758 -45.807,37.886 -45.807,48.681 -39.243,55.245 v1(-39.243,55.88)
KEY21: MCP2.5 R1_U_KEY21.1 | length 73.5
  Top Layer w0.254: v1(-39.188,54.555) -39.16,54.582 -36.58,54.582 MCP2.5@-36.552,54.61 ; R1_U_KEY21.1@-22.921,9.616 -22.921,9.586 v1(-21.844,8.509)
  Layer 1 w0.254: v1(-39.188,54.555) -43.368,50.187 -44.503,42.427 -44.503,42.217 -41.91,39.624 -24.003,39.624 -19.939,35.56 -19.939,23.147 -19.926,23.135 -19.926,10.427 v1(-21.844,8.509)
KEY22: MCP2.6 R1_U_KEY22.1 | length 87.6
  Top Layer w0.254: v1(-39.243,53.34) MCP2.6@-36.552,53.34 ; R1_U_KEY22.1@-3.866,9.616 -3.719,9.616 -2.495,10.84 -2.495,10.986 v1(-2.032,11.449)
  Layer 1 w0.254: v1(-39.243,53.34) -42.272,50.711 -42.964,50.019 -43.233,43.57 -43.233,43.36 -40.386,40.513 -6.731,40.513 0.127,33.655 0.127,13.462 -0.856,12.479 -1.002,12.479 v1(-2.032,11.449)
KEY23: MCP2.7 R1_U_KEY23.1 | length 108.8
  Top Layer w0.254: v1(-39.243,52.197) -39.196,52.15 -36.632,52.15 MCP2.7@-36.552,52.07 ; R1_U_KEY23.1@15.665,8.971 15.665,8.493 15.647,8.475 15.665,8.458 15.665,7.957 v1(17.399,6.223)
  Layer 1 w0.254: v1(-39.243,52.197) -42.105,50.307 -42.56,49.852 -42.56,49.208 -42.486,44.899 -38.989,41.402 10.795,41.402 18.542,33.655 18.542,7.366 v1(17.399,6.223)
KEY24: MCP2.8 R1_U_KEY24.1 | length 270.5
  Top Layer w0.254: R1_U_KEY24.1@-211.003,-8.357 -210.795,-8.357 v1(-209.423,-6.985) ; v1(-39.243,50.927) -39.176,50.927 -39.049,50.8 MCP2.8@-36.552,50.8
  Layer 1 w0.254: v1(-209.423,-6.985) -209.423,53.721 -198.755,64.389 -32.754,64.389 -30.48,62.115 -30.48,50.927 -31.242,50.165 -38.481,50.165 v1(-39.243,50.927)
KEY25: MCP2.21 R1_U_KEY25.1 | length 242.3
  Top Layer w0.254: R1_U_KEY25.1@-179.752,-9.218 -179.77,-9.236 -179.77,-10.791 -179.705,-10.855 v1(-179.705,-10.922) ; v1(-31.242,51.181) -31.175,51.181 -30.794,50.8 MCP2.21@-27.202,50.8
  Layer 1 w0.254: v1(-179.705,-10.922) -194.37,3.743 -194.37,31.436 -162.052,63.754 -33.274,63.754 -31.242,61.722 v1(-31.242,51.181)
KEY26: MCP2.22 R1_U_KEY26.1 | length 257
  Top Layer w0.254: v1(-160.909,-10.795) -160.909,-10.728 -160.847,-10.666 -160.847,-9.363 R1_U_KEY26.1@-160.829,-9.345 ; v1(-32.004,52.578) -31.496,52.07 MCP2.22@-27.202,52.07
  Layer 1 w0.254: v1(-160.909,-10.795) -160.927,-10.795 -161.181,-11.049 -172.593,-11.049 -173.736,-9.906 -179.705,-9.906 -193.548,3.937 -193.548,31.242 -161.671,63.119 -33.782,63.119 -32.004,61.341 v1(-32.004,52.578)
KEY27: MCP2.23 R1_U_KEY27.1 | length 273
  Top Layer w0.254: v1(-141.986,-10.922) -141.986,-10.855 -141.67,-10.539 -141.67,-9.236 R1_U_KEY27.1@-141.652,-9.218 ; v1(-32.843,53.653) -32.777,53.653 -32.464,53.34 MCP2.23@-27.202,53.34
  Layer 1 w0.254: v1(-141.986,-10.922) -143.637,-9.271 -179.451,-9.271 -193.04,4.318 -193.04,30.988 -161.544,62.484 -34.29,62.484 -32.766,60.96 v1@-32.766,53.594
KEY28: MCP2.24 R1_U_KEY28.1 | length 288.4
  Top Layer w0.254: v1(-122.682,-10.668) -122.663,-10.649 -122.663,-9.265 R1_U_KEY28.1@-122.646,-9.247 ; v1(-33.502,55.114) -32.998,54.61 MCP2.24@-27.202,54.61
  Layer 1 w0.254: v1(-122.682,-10.668) -124.696,-8.654 -179.433,-8.654 -192.532,4.445 -192.532,30.607 -161.163,61.976 -34.671,61.976 -33.528,60.833 v1@-33.528,55.118
KEY29: MCP2.25 R1_U_KEY29.1 | length 180.4
  Top Layer w0.254: R1_U_KEY29.1@-103.552,-9.091 -103.57,-9.109 -103.57,-10.664 -103.505,-10.728 v1(-103.505,-10.795) ; v1(-34.163,56.007) -34.096,56.007 -33.969,55.88 MCP2.25@-27.202,55.88
  Layer 1 w0.254: v1(-103.505,-10.795) -105.008,-9.292 -119.486,-9.292 -124.46,-4.318 -124.46,4.064 -114.3,14.224 -114.3,36.576 -109.22,41.656 -101.219,41.656 -98.298,44.577 -98.298,57.531 -94.361,61.468 -35.179,61.468 -34.163,60.452 v1(-34.163,56.007)
KEY30: MCP2.26 R1_U_KEY30.1 | length 194.5
  Top Layer w0.254: v1(-84.709,-10.922) -84.709,-10.855 -84.647,-10.793 -84.647,-9.236 R1_U_KEY30.1@-84.629,-9.218 ; v1(-34.798,57.15) MCP2.26@-27.202,57.15
  Layer 1 w0.254: v1(-84.709,-10.922) -86.977,-8.654 -118.473,-8.654 -123.825,-3.302 -123.825,3.493 -113.642,13.676 -113.642,35.329 -107.95,41.021 -100.457,41.021 -96.52,44.958 -96.52,57.531 -93.218,60.833 -35.433,60.833 -34.798,60.198 v1(-34.798,57.15)
KEY31: MCP2.27 R1_U_KEY31.1 | length 211.3
  Top Layer w0.254: R1_U_KEY31.1@-65.661,-9.3 -65.679,-9.318 -65.679,-10.775 v1(-65.659,-10.795) ; MCP2.27@-27.202,58.42 -27.122,58.5 -21.129,58.5 v1(-21.082,58.547)
  Layer 1 w0.254: v1(-65.659,-10.795) -63.5,-8.636 -60.597,-8.636 -60.579,-8.654 13.825,-8.654 32.582,10.103 38.1,15.621 38.1,36.068 15.621,58.547 v1(-21.082,58.547)
KEY32: MCP2.28 R1_U_KEY32.1 | length 197.3
  Top Layer w0.254: R1_U_KEY32.1@-46.148,-9.091 -46.166,-9.109 -46.166,-10.537 -46.101,-10.601 v1(-46.101,-10.668) ; MCP2.28@-27.202,59.69 v1(-21.082,59.69)
  Layer 1 w0.254: v1(-46.101,-10.668) -44.577,-9.144 15.215,-9.144 38.735,14.376 38.735,41.275 20.32,59.69 v1(-21.082,59.69)
KEY33: MCP3.1 R1_U_KEY33.1 | length 166.3
  Top Layer w0.254: MCP3.1@-115.062,-66.318 v1(-115.062,-60.833) ; v1(-27.305,-10.795) -27.286,-10.776 -27.286,-9.138 R1_U_KEY33.1@-27.269,-9.12
  Layer 1 w0.254: v1(-115.062,-60.833) -100.79,-75.105 -41.577,-75.105 -31.242,-64.77 -31.242,-52.324 -24.003,-45.085 -24.003,-34.163 -33.274,-24.892 -33.274,-13.589 -30.48,-10.795 v1(-27.305,-10.795)
KEY34: MCP3.2 R1_U_KEY34.1 | length 189.3
  Top Layer w0.254: v1(-116.459,-60.833) -116.459,-60.9 -116.332,-61.027 MCP3.2@-116.332,-66.318 ; v1(-8.89,-10.922) -8.89,-9.786 R1_U_KEY34.1@-8.33,-9.227
  Layer 1 w0.254: v1(-116.459,-60.833) -101.092,-76.2 -20.701,-76.2 -11.43,-66.929 -11.43,-48.768 -3.937,-41.275 -3.937,-34.925 -14.097,-24.765 -14.097,-14.224 -10.795,-10.922 v1(-8.89,-10.922)
KEY35: MCP3.3 R1_U_KEY35.1 | length 192.7
  Top Layer w0.254: v1(-117.729,-60.833) -117.729,-60.9 -117.602,-61.027 MCP3.3@-117.602,-66.318 ; v1(11.049,-11.557) 11.083,-11.523 11.083,-9.22 R1_U_KEY35.1@11.101,-9.202
  Layer 1 w0.254: v1(-117.729,-60.833) -100.711,-77.851 -18.542,-77.851 -9.398,-68.707 -9.398,-49.911 11.049,-29.464 v1(11.049,-11.557)
KEY36: MCP3.4 R1_U_KEY36.1 | length 224.4
  Top Layer w0.254: MCP3.4@-118.872,-66.318 v1(-118.872,-60.96) ; R1_U_KEY36.1@37.946,-9.218 37.946,-9.171 v1(39.243,-7.874)
  Layer 1 w0.254: v1(-118.872,-60.96) -100.457,-79.375 4.953,-79.375 16.002,-68.326 16.002,-53.975 37.973,-32.004 37.973,-9.078 39.177,-7.874 v1(39.243,-7.874)
KEY37: MCP3.5 R1_U_KEY37.1 | length 83.9
  Top Layer w0.254: R1_U_KEY37.1@-188.415,-58.503 -188.468,-58.556 -188.468,-66.548 -181.991,-73.025 -123.317,-73.025 -120.142,-69.85 MCP3.5@-120.142,-66.318
KEY38: MCP3.6 R1_U_KEY38.1 | length 63.3
  Top Layer w0.254: R1_U_KEY38.1@-168.73,-58.503 -168.73,-68.887 -165.608,-72.009 -123.698,-72.009 -121.412,-69.723 MCP3.6@-121.412,-66.318
KEY39: MCP3.7 R1_U_KEY39.1 | length 42.1
  Top Layer w0.254: R1_U_KEY39.1@-149.741,-58.293 -149.733,-58.301 -149.733,-68.58 -147.32,-70.993 -124.206,-70.993 -122.682,-69.469 MCP3.7@-122.682,-66.318
KEY40: MCP3.8 R1_U_KEY40.1 | length 12
  Top Layer w0.254: R1_U_KEY40.1@-129.678,-58.183 -129.678,-59.552 -128.143,-61.087 -125.603,-61.087 -123.952,-62.738 MCP3.8@-123.952,-66.318
KEY41: MCP3.21 R1_U_KEY41.1 | length 24.6
  Top Layer w0.254: MCP3.21@-123.952,-75.668 -123.952,-75.068 -117.591,-68.707 -114.173,-68.707 -111.768,-66.302 R1_U_KEY41.1@-111.768,-58.166
KEY42: MCP3.22 R1_U_KEY42.1 | length 33.6
  Top Layer w0.254: MCP3.22@-122.682,-75.668 -122.682,-75.068 -117.718,-70.104 -111.252,-70.104 -104.841,-76.515 -95.245,-76.515 -95.003,-76.273 -94.978,-76.273 -94.64,-75.935 R1_U_KEY42.1@-94.64,-75.91
KEY43: MCP3.23 R1_U_KEY43.1 | length 59.9
  Top Layer w0.254: MCP3.23@-121.412,-75.668 -121.412,-75.068 -117.464,-71.12 -112.014,-71.12 -105.537,-77.597 -87.376,-77.597 -83.066,-73.287 R1_U_KEY43.1@-83.066,-58.41
KEY44: MCP3.24 R1_U_KEY44.1 | length 72.1
  Top Layer w0.254: MCP3.24@-120.142,-75.668 -120.142,-75.068 -117.21,-72.136 -112.776,-72.136 -106.426,-78.486 -73.66,-78.486 -70.874,-75.7 R1_U_KEY44.1@-70.874,-58.445
KEY45: MCP3.25 R1_U_KEY45.1 | length 88.2
  Top Layer w0.254: MCP3.25@-118.872,-75.668 -118.872,-75.068 -116.702,-72.898 -113.538,-72.898 -107.188,-79.248 -56.896,-79.248 -54.044,-76.396 R1_U_KEY45.1@-54.044,-58.328
KEY46: MCP3.26 R1_U_KEY46.1 | length 107.7
  Top Layer w0.254: MCP3.26@-117.602,-75.668 -117.602,-75.068 -116.194,-73.66 -113.919,-73.66 -107.315,-80.264 -37.465,-80.264 -34.647,-77.446 R1_U_KEY46.1@-34.647,-57.82
KEY47: MCP3.27 R1_U_KEY47.1 | length 131.3
  Top Layer w0.254: MCP3.27@-116.332,-75.668 -116.332,-75.068 -115.559,-74.295 -114.681,-74.295 -107.569,-81.407 -13.462,-81.407 -10.776,-78.721 R1_U_KEY47.1@-10.776,-57.93
KEY48: R1_U_KEY48.1 U3.30 | length 356.4
  Top Layer w0.254: U3.30@-270.726,5.108 -270.726,4.026 -270.129,3.429 v3(-268.097,3.429) ; v1(13.97,-60.833) 13.97,-58.406 R1_U_KEY48.1@14.048,-58.328
  Bottom Layer w0.254: v3(-268.097,3.429) -266.446,1.778 -266.446,-29.845 -237.109,-59.182 -121.793,-59.182 -102.235,-78.74 9.398,-78.74 13.97,-74.168 v1(13.97,-60.833)
KEY49: R1_U_KEY49.1 U3.15 | length 299.1
  Top Layer w0.254: v3(-267.208,-2.667) -267.142,-2.601 -267.142,-1.814 -266.993,-1.665 -266.028,-1.665 U3.15@-265.969,-1.606 ; R1_U_KEY49.1@-21.979,-76.454 -21.971,-76.462 v1(-21.971,-80.137)
  Bottom Layer w0.254: v3(-267.208,-2.667) -267.142,-2.733 -267.142,-30.038 -237.363,-59.817 -122.174,-59.817 -101.854,-80.137 v1(-21.971,-80.137)
KEY50: R1_U_KEY50.1 U3.16 | length 325.5
  Top Layer w0.254: v3(-267.843,-1.524) -267.749,-1.524 -267.369,-1.143 -267.352,-1.143 -267.127,-0.919 U3.16@-265.982,-0.919 ; R1_U_KEY50.1@1.516,-76.546 1.524,-76.554 v1(1.524,-80.899)
  Bottom Layer w0.254: v3(-267.843,-1.524) -267.843,-30.226 -237.363,-60.706 -122.301,-60.706 -102.108,-80.899 v1(1.524,-80.899)
KEY51: R1_U_KEY51.1 U3.17 | length 351.2
  Top Layer w0.254: v3(-268.605,-1.016) -267.781,-0.192 -265.955,-0.192 U3.17@-265.896,-0.133 ; v1(24.892,-76.835) 24.909,-76.852 R1_U_KEY51.1@26.64,-76.852
  Bottom Layer w0.254: v3(-268.605,-1.016) -268.605,-30.48 -237.236,-61.849 -122.301,-61.849 -102.235,-81.915 19.812,-81.915 v1(24.892,-76.835)
MISO: MS1.6 MS2.6 MS3.6 MS4.6 MS5.6 MS6.6 MS7.6 MS8.6 U3.28 | length 623
  Top Layer w0.254: U3.28@-269.396,5.167 -269.323,5.24 -269.323,6.323 -268.733,6.913 v3(-268.733,6.964) ; v1(-169.291,-28.702) -168.783,-29.21 -167.419,-29.21 -166.877,-28.668 -166.877,-28.235 MS8.6@-166.874,-28.232 ; v1(-156.845,12.192) -156.845,11.557 -155.215,9.927 -152.759,9.927 -152.488,10.198 -152.488,10.631 MS4.6@-152.485,10.634 ; v1(-112.776,-29.083) -112.758,-29.083 -112.504,-29.337 -109.728,-29.337 -109.473,-29.082 -109.473,-28.489 MS7.6@-109.47,-28.486 ; v1(-99.314,12.065) -99.295,12.046 -99.295,11.434 -97.155,9.294 -95.504,9.294 -95.16,9.638 -95.16,10.138 MS3.6@-95.157,10.141 ; v1(-56.007,-29.083) -55.94,-29.083 -55.813,-29.21 -52.977,-29.21 -52.828,-29.061 MS6.6@-52.828,-28.359 ; v1(-42.291,12.446) -42.291,11.43 -40.259,9.398 -38.735,9.398 -38.515,9.618 MS2.6@-38.515,10.364 ; v1(3.853,-28.623) 4.361,-29.131 6.647,-29.131 7.168,-28.61 7.168,-27.991 MS5.6@7.171,-27.988 ; v1(14.948,11.442) 17.869,8.521 19.012,8.521 19.397,8.906 MS1.6@19.397,9.626
  Bottom Layer w0.254: v3@-268.754,6.985 -268.688,7.051 -268.688,7.283 -265.176,10.795 -158.242,10.795 v1(-156.845,12.192) -156.337,12.7 -151.257,12.7 -149.098,10.541 -100.838,10.541 v1(-99.314,12.065) -99.314,12.132 -99.06,12.386 -95.825,12.386 -94.107,10.668 -43.561,10.668 -42.291,11.938 v1(-42.291,12.446) -42.224,12.446 -41.82,12.85 -40.346,12.85 -38.492,10.996 -38.418,10.922 -29.25,10.922 ccw(c-28.58,19.55) -27.91,10.922 -10.2,10.922 ccw(c-9.53,19.55) -8.86,10.922 8.85,10.922 ccw(c9.52,19.55) 10.19,10.922 14.428,10.922 v1(14.948,11.442) ; v3(-268.733,6.964) -268.754,6.942 -268.754,6.118 -233.807,-28.829 v1@-169.439,-28.829 ; v1(-169.291,-28.702) -168.603,-29.39 -168.529,-29.464 -167.248,-29.464 cw(c-166.69,-38.1) -166.132,-29.464 -148.198,-29.464 cw(c-147.64,-38.1) -147.082,-29.464 -129.148,-29.464 cw(c-128.59,-38.1) -128.032,-29.464 -113.157,-29.464 v1(-112.776,-29.083) v1(-56.007,-29.083) -55.73,-29.36 3.152,-29.36 v1@3.968,-28.544
MOSI: MS1.5 MS2.5 MS3.5 MS4.5 MS5.5 MS6.5 MS7.5 MS8.5 U3.27 | length 609.2
  Top Layer w0.254: U3.27@-268.696,5.167 -268.623,5.24 -268.623,6.103 v3@-267.966,6.759 ; v1(-170.053,-27.94) -169.986,-27.94 -169.605,-27.559 -169.291,-27.559 -168.618,-28.232 MS8.5@-167.374,-28.232 ; v1(-155.829,11.811) -155.782,11.764 -155.782,11.256 -155.16,10.634 MS4.5@-152.985,10.634 ; v1(-113.157,-27.94) -112.611,-28.486 MS7.5@-109.97,-28.486 ; v1(-98.425,11.684) -98.378,11.637 -98.378,11.152 -97.367,10.141 MS3.5@-95.657,10.141 ; v1(-56.388,-28.194) -56.321,-28.194 -56.156,-28.359 MS6.5@-53.328,-28.359 ; v1(-41.529,12.065) -41.482,12.018 -41.482,11.51 -40.336,10.364 MS2.5@-39.015,10.364 ; v1(3.853,-27.607) 3.919,-27.607 4.3,-27.988 MS5.5@6.671,-27.988 ; v1(15.837,11.442) 17.653,9.626 MS1.5@18.897,9.626
  Bottom Layer w0.254: v1@3.888,-27.608 2.667,-28.829 -53.149,-28.829 -53.784,-28.194 -56.406,-28.194 -56.66,-28.448 -56.81,-28.598 -112.499,-28.598 v1(-113.157,-27.94) -113.896,-28.679 -167.663,-28.679 -168.783,-27.559 -169.605,-27.559 -169.986,-27.94 v1(-170.053,-27.94) -170.434,-28.321 -233.553,-28.321 -267.9,6.026 v3(-267.9,6.985) -267.834,7.051 -267.834,7.375 -264.922,10.287 -157.353,10.287 v1(-155.829,11.811) -155.762,11.811 -155.639,11.934 -155.63,11.934 -155.499,12.065 -152.019,12.065 -150.091,10.137 -99.972,10.137 v1(-98.425,11.684) -98.358,11.684 -98.104,11.938 -95.948,11.938 -94.193,10.183 -43.157,10.183 -41.576,11.764 -41.576,12.018 v1(-41.529,12.065) -41.462,12.065 -41.081,12.446 -40.64,12.446 -38.555,10.361 -38.481,10.287 14.682,10.287 v1(15.837,11.442)
NetC1_2: C1.2 D1.2 Q1.2 R2.2 U2.1 | length 13.2
  Top Layer w0.381: C1.2@-270.383,-15.232 -270.383,-12.749 D1.2@-270.432,-12.7 -270.307,-12.7 -268.689,-14.318 -268.257,-14.318 Q1.2@-268.097,-14.478 ; R2.2@-267.724,-16.637 -267.724,-16.612 -268.097,-16.239 Q1.2@-268.097,-14.478 ; U2.1@-263.059,-14.036 -264.099,-14.036 -264.541,-14.478 Q1.2@-268.097,-14.478
NetC3_1: C3.1 U3.13 X1.2 | length 5.7
  Top Layer w0.381: U3.13@-265.826,-2.992 -264.215,-2.992 -263.417,-3.79 X1.2@-263.017,-3.79 -263.017,-5.555 -263.533,-6.071 C3.1@-263.533,-6.096
NetC4_1: C4.1 U3.14 X1.1 | length 5.5
  Top Layer w0.381: U3.14@-265.826,-2.292 -264.419,-2.292 -263.417,-1.29 X1.1@-263.223,-1.29 ; C4.1@-263.533,0.889 -263.533,-0.98 -263.32,-1.193 X1.1@-263.223,-1.29 ; X1.1@-263.017,-1.29 X1.1@-263.223,-1.29
NetC6_2: C6.2 L2.2 U3.9 | length 4.6
  Top Layer w0.381: L2.2@-270.598,-8.128 -270.492,-8.022 -270.492,-7.221 -270.023,-6.752 -270.023,-6.472 -269.326,-5.776 U3.9@-269.326,-4.092
NetD1_U_KEY1_2: D1_U_KEY1.2 P-_U_KEY1.1 Q1_U_KEY1.3 | length 5.5
  Top Layer w1.27: P-_U_KEY1.1@-226.949,29.972 -226.949,32.09 -225.841,33.198 Q1_U_KEY1.3@-225.841,35.052
NetD1_U_KEY2_2: D1_U_KEY2.2 P-_U_KEY2.1 Q1_U_KEY2.3 | length 5
  Top Layer w1.27: Q1_U_KEY2.3@-179.197,35.103 D1_U_KEY2.2@-179.197,32.258 -179.197,30.185 P-_U_KEY2.1@-179.111,30.099
NetD1_U_KEY3_2: D1_U_KEY3.2 P-_U_KEY3.1 Q1_U_KEY3.3 | length 5
  Top Layer w1.27: Q1_U_KEY3.3@-160.147,34.849 D1_U_KEY3.2@-160.147,32.004 -160.147,29.931 P-_U_KEY3.1@-160.061,29.845
NetD1_U_KEY4_2: D1_U_KEY4.2 P-_U_KEY4.1 Q1_U_KEY4.3 | length 5
  Top Layer w1.27: Q1_U_KEY4.3@-140.97,34.722 D1_U_KEY4.2@-140.97,31.877 -140.97,29.804 P-_U_KEY4.1@-140.884,29.718
NetD1_U_KEY5_2: D1_U_KEY5.2 P-_U_KEY5.1 Q1_U_KEY5.3 | length 5
  Top Layer w1.27: Q1_U_KEY5.3@-122.174,34.849 D1_U_KEY5.2@-122.174,32.004 -122.174,29.931 P-_U_KEY5.1@-122.088,29.845
NetD1_U_KEY6_2: D1_U_KEY6.2 P-_U_KEY6.1 Q1_U_KEY6.3 | length 5
  Top Layer w1.27: Q1_U_KEY6.3@-103.124,35.052 D1_U_KEY6.2@-103.124,32.207 -103.124,30.134 P-_U_KEY6.1@-103.038,30.048
NetD1_U_KEY7_2: D1_U_KEY7.2 P-_U_KEY7.1 Q1_U_KEY7.3 | length 5.2
  Top Layer w1.27: Q1_U_KEY7.3@-83.261,35.128 -83.185,35.052 -83.185,30.48 P-_U_KEY7.1@-82.804,30.099
NetD1_U_KEY8_2: D1_U_KEY8.2 P-_U_KEY8.1 Q1_U_KEY8.3 | length 5
  Top Layer w1.27: Q1_U_KEY8.3@-64.135,35.052 D1_U_KEY8.2@-64.135,32.207 -64.135,30.134 P-_U_KEY8.1@-64.049,30.048
NetD1_U_KEY9_2: D1_U_KEY9.2 P-_U_KEY9.1 Q1_U_KEY9.3 | length 5
  Top Layer w1.27: Q1_U_KEY9.3@-45.532,35.088 D1_U_KEY9.2@-45.532,32.243 -45.532,30.17 P-_U_KEY9.1@-45.447,30.084
NetD1_U_KEY10_2: D1_U_KEY10.2 P-_U_KEY10.1 Q1_U_KEY10.3 | length 5
  Top Layer w1.27: Q1_U_KEY10.3@-26.797,35.361 D1_U_KEY10.2@-26.797,32.517 -26.797,30.443 P-_U_KEY10.1@-26.711,30.358
NetD1_U_KEY11_2: D1_U_KEY11.2 P-_U_KEY11.1 Q1_U_KEY11.3 | length 5
  Top Layer w1.27: Q1_U_KEY11.3@-8.128,35.484 D1_U_KEY11.2@-8.128,32.639 -8.128,30.566 P-_U_KEY11.1@-8.042,30.48
NetD1_U_KEY12_2: D1_U_KEY12.2 P-_U_KEY12.1 Q1_U_KEY12.3 | length 5
  Top Layer w1.27: Q1_U_KEY12.3@11.598,35.23 D1_U_KEY12.2@11.598,32.385 11.598,30.312 P-_U_KEY12.1@11.684,30.226
NetD1_U_KEY13_2: D1_U_KEY13.2 P-_U_KEY13.1 Q1_U_KEY13.3 | length 5
  Top Layer w1.27: Q1_U_KEY13.3@30.607,35.814 D1_U_KEY13.2@30.607,32.969 30.607,30.896 P-_U_KEY13.1@30.693,30.81
NetD1_U_KEY14_2: D1_U_KEY14.2 P-_U_KEY14.1 Q1_U_KEY14.3 | length 5
  Top Layer w1.27: P-_U_KEY14.1@-162.543,4.354 D1_U_KEY14.2@-161.236,5.661 ; D1_U_KEY14.2@-161.12,5.781 -161.071,5.781 -161,5.852 -159.9,5.852 Q1_U_KEY14.3@-158.526,7.226
NetD1_U_KEY15_2: D1_U_KEY15.2 P-_U_KEY15.1 Q1_U_KEY15.3 | length 5.4
  Top Layer w1.27: P-_U_KEY15.1@-143.332,4.354 D1_U_KEY15.2@-142.024,5.661 ; P-_U_KEY15.1@-143.239,4.402 P-_U_KEY15.1@-142.954,4.117 ; D1_U_KEY15.2@-141.908,5.781 -141.859,5.781 -141.788,5.852 -140.688,5.852 Q1_U_KEY15.3@-139.314,7.226
NetD1_U_KEY16_2: D1_U_KEY16.2 P-_U_KEY16.1 Q1_U_KEY16.3 | length 5.4
  Top Layer w1.27: P-_U_KEY16.1@-124.257,4.639 -123.972,4.354 D1_U_KEY16.2@-122.665,5.661 ; D1_U_KEY16.2@-122.549,5.781 -121.075,7.255 Q1_U_KEY16.3@-120.031,7.255
NetD1_U_KEY17_2: D1_U_KEY17.2 P-_U_KEY17.1 Q1_U_KEY17.3 | length 5.2
  Top Layer w1.27: P-_U_KEY17.1@-105.115,4.201 -105.153,4.239 -105.153,4.419 D1_U_KEY17.2@-103.911,5.661 ; D1_U_KEY17.2@-103.795,5.781 -103.745,5.781 -103.675,5.852 -102.575,5.852 Q1_U_KEY17.3@-101.2,7.226
NetD1_U_KEY18_2: D1_U_KEY18.2 P-_U_KEY18.1 Q1_U_KEY18.3 | length 5.4
  Top Layer w1.27: P-_U_KEY18.1@-86.187,4.354 D1_U_KEY18.2@-84.88,5.661 ; P-_U_KEY18.1@-86.089,4.529 P-_U_KEY18.1@-85.804,4.244 ; D1_U_KEY18.2@-84.763,5.781 -84.714,5.781 -84.644,5.852 -83.544,5.852 Q1_U_KEY18.3@-82.169,7.226
NetD1_U_KEY19_2: D1_U_KEY19.2 P-_U_KEY19.1 Q1_U_KEY19.3 | length 5.4
  Top Layer w1.27: P-_U_KEY19.1@-67.075,4.354 D1_U_KEY19.2@-65.768,5.661 ; P-_U_KEY19.1@-67.039,4.529 P-_U_KEY19.1@-66.754,4.244 ; D1_U_KEY19.2@-65.652,5.781 -65.603,5.781 -65.532,5.852 -64.432,5.852 Q1_U_KEY19.3@-63.057,7.226
NetD1_U_KEY20_2: D1_U_KEY20.2 P-_U_KEY20.1 Q1_U_KEY20.3 | length 5.4
  Top Layer w1.27: P-_U_KEY20.1@-48.013,4.375 P-_U_KEY20.1@-47.728,4.091 ; P-_U_KEY20.1@-47.955,4.354 D1_U_KEY20.2@-46.647,5.661 ; D1_U_KEY20.2@-46.531,5.781 -46.482,5.781 -46.411,5.852 -45.311,5.852 Q1_U_KEY20.3@-43.937,7.226
NetD1_U_KEY21_2: D1_U_KEY21.2 P-_U_KEY21.1 Q1_U_KEY21.3 | length 5.3
  Top Layer w1.27: P-_U_KEY21.1@-29.068,4.639 -28.783,4.354 D1_U_KEY21.2@-27.476,5.661 ; D1_U_KEY21.2@-27.359,5.781 -25.886,7.255 Q1_U_KEY21.3@-24.908,7.255
NetD1_U_KEY22_2: D1_U_KEY22.2 P-_U_KEY22.1 Q1_U_KEY22.3 | length 5.3
  Top Layer w1.27: P-_U_KEY22.1@-9.762,4.402 P-_U_KEY22.1@-9.477,4.117 ; P-_U_KEY22.1@-9.728,4.354 D1_U_KEY22.2@-8.42,5.661 ; D1_U_KEY22.2@-8.304,5.781 -6.83,7.255 Q1_U_KEY22.3@-5.858,7.255
NetD1_U_KEY23_2: D1_U_KEY23.2 P-_U_KEY23.1 Q1_U_KEY23.3 | length 5.4
  Top Layer w1.27: P-_U_KEY23.1@9.803,3.71 D1_U_KEY23.2@11.11,5.017 ; P-_U_KEY23.1@9.899,3.613 P-_U_KEY23.1@10.184,3.329 ; D1_U_KEY23.2@11.226,5.136 11.275,5.136 11.346,5.207 12.446,5.207 Q1_U_KEY23.3@13.821,6.582
NetD1_U_KEY24_2: D1_U_KEY24.2 P-_U_KEY24.1 Q1_U_KEY24.3 | length 6.4
  Top Layer w1.27: P-_U_KEY24.1@-217.006,-14.515 -217.271,-14.25 -217.271,-14.071 -213.923,-10.723 -212.871,-10.723 Q1_U_KEY24.3@-212.847,-10.747
NetD1_U_KEY25_2: D1_U_KEY25.2 P-_U_KEY25.1 Q1_U_KEY25.3 | length 5.7
  Top Layer w1.27: P-_U_KEY25.1@-185.948,-14.859 D1_U_KEY25.2@-184.141,-13.053 -182.672,-11.584 -181.62,-11.584 Q1_U_KEY25.3@-181.596,-11.607